# Altium PCB Buzzer_Led.PcbDoc
Units mm, origin at the board's own origin, x right, y up, seen from the top; angles counter-clockwise.
Board outline 71.37 x 15.37 mm, 2 copper layers (Top Layer, Bottom Layer); 5 components, 5 nets, 13 pads, 0 vias.
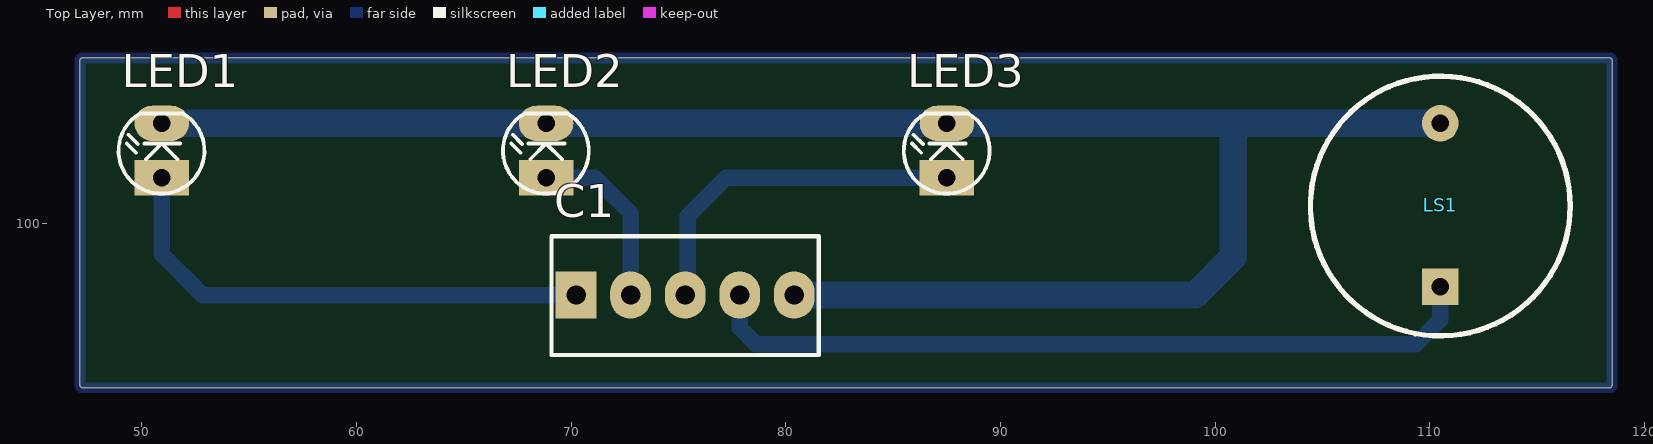
[diagram p0: Top Layer view]
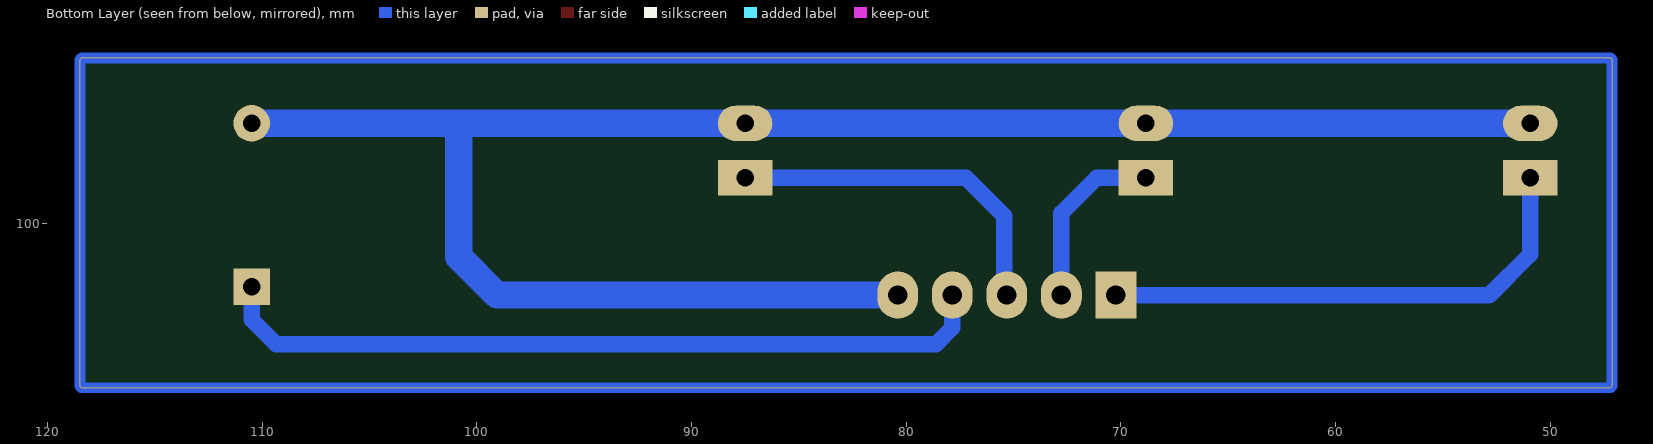
[diagram p1: Bottom Layer view, seen from below]
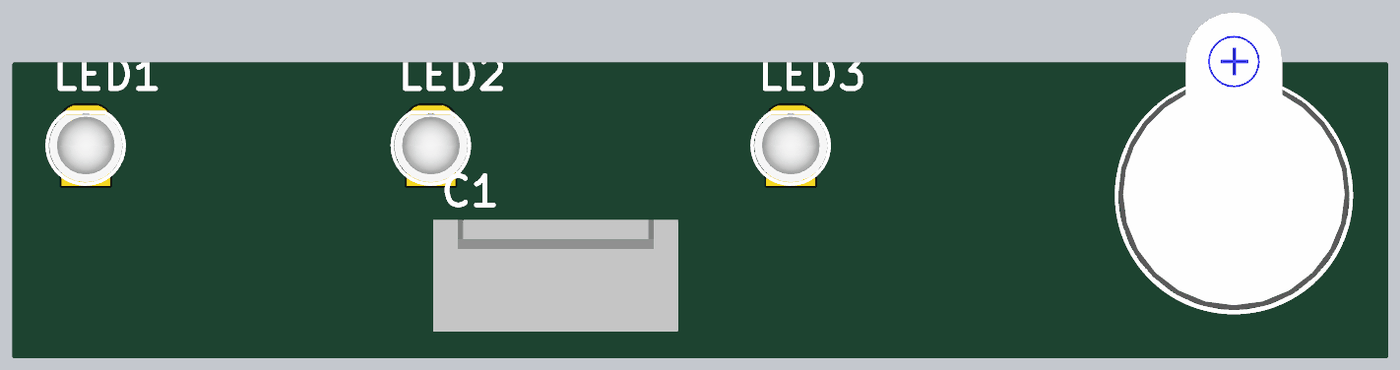
[diagram p2: 3D render of the assembled board from above, using the file's embedded part models]

## Layer stack, top to bottom
Top Solder: solder mask 0.0102, Solder Resist, Dk 3.5
Top Layer: signal copper 0.0356
Dielectric 1: dielectric 0.32, FR-4, Dk 4.8
Bottom Layer: signal copper 0.0356
Bottom Solder: solder mask 0.0102, Solder Resist, Dk 3.5

## Board outline
47.244,92.329 cw(c47.244,92.456) 47.117,92.456 47.117,107.569 cw(c47.244,107.569) 47.244,107.696 118.364,107.696 cw(c118.364,107.569) 118.491,107.569 118.491,92.456 cw(c118.364,92.456) 118.364,92.329

## Design rules (kind name [scope] priority, off if disabled: settings)
Clearance [All] p1: gap=0.3
PolygonConnect [All] p1: connectstyle=Relief reliefconductorwidth=0.254 reliefentries=4 polygonreliefangle="90 Angle" airgapwidth=0.254
RoutingVias [All] p1: holewidth=0.711 width=1.27 viastyle="Through Hole" minholewidth=0.711 minwidth=1.27 maxholewidth=0.711 maxwidth=1.27
SolderMaskExpansion [All] p1: expansion=0.102
Width [All] p1: maxlimit=1.27 minlimit=0.254 preferedwidth=0.762
30 further rules are at their usual default settings.

## Components (designator, comment, footprint, x,y, rotation, side; value= is the part's Value field where it differs from the comment)
C1 "canh bao" HDR5 70.231,96.647 r0 top
LED1 "LED" LED-3 50.927,102.108 r90 top
LED2 "LED" LED-3 68.834,102.108 r90 top
LED3 "LED" LED-3 87.503,102.108 r90 top
LS1 "Buzzer" Buzzer 110.49,97.028 r90 top

## Footprints (in the part's own frame and the unit in brackets; to place one, negate y for a bottom-side part, rotate by r counter-clockwise, add the part's x,y. Pads: shape width x height; smd on the part's side, far side on the other; paste and mask are expansions set on the pad)
Buzzer [mil] "Buzzer; Solder Pad 35mil"
  rect 67x67 hole 32: 1(0,0)
  round 67 hole 32: 2(300,0)
  silkscreen extent -90,-238 387,238, body extent -86,-236 522,236, height 177
HDR5 [mm] "Connector; Header; 5 Position"
  rect 1.9x2.2 hole 0.9: 1(0,0)
  oval 1.9x2.2 hole 0.9: 2(2.54,0) 3(5.08,0) 4(7.62,0) 5(10.16,0)
  silkscreen extent -1.14,-2.79 11.3,2.74, body extent -1.27,-2.92 11.43,2.88, height 11.72
LED-3 [mil] "LED 2 PIN, 3ly Only colour"
  rect 65x100 hole 32: 1(0,0)
  oval 65x100 hole 32: 2(100,0)
  silkscreen extent -29,-78 118,79, body extent -25,-75 113,75, height 217

## Part data
C1: library part Header5, "Header IDC, 5 x 1 Pin Vertical 2.54mm Pitch (Non-Boxed, Male)"
LED1 LED2 LED3: "LED Single colour Green and Red"
LS1: "Magnetic Transducer Buzzer"

## Nets (pads, with @x,y where several pads share a name; then routed paths per layer and width w, separated by ;. In a path a pad name is that pad's centre, name@x,y a point inside that pad or via, vN(x,y) a via of type N, cw(c..) or ccw(c..) an arc to the next point about the centre after c; other vN are vias at no path point)
BUZZER: C1.4 LS1.1 | length 36.5
  Bottom Layer w0.762: C1.4 77.851,95.123 78.613,94.361 109.347,94.361 110.49,95.504 LS1.1
GND: C1.5 LED1.2 LED2.2 LED3.2 LS1.2 | length 87
  Bottom Layer w1.27: LED1.2 LED3.2 100.838,104.648 ; C1.5 99.06,96.647 100.838,98.425 100.838,104.648 ; LS1.2 100.838,104.648
LED_DOOR: C1.1 LED1.1 | length 23.6
  Bottom Layer w0.762: LED1.1 50.927,98.552 52.832,96.647 C1.1
LED_LIQUID: C1.2 LED2.1 | length 8.7
  Bottom Layer w0.762: LED2.1@68.58,102.108 71.12,102.108 72.771,100.457 C1.2
LED_SET: C1.3 LED3.1 | length 15.8
  Bottom Layer w0.762: C1.3@75.438,97.282 75.438,100.33 77.216,102.108 LED3.1
copper on no net: | length 173.3
  Bottom Layer w0.5: 47.117,92.456 ccw(c47.244,92.456) 47.244,92.329 118.364,92.329 ccw(c118.364,92.456) 118.491,92.456 118.491,107.569 ccw(c118.364,107.569) 118.364,107.696 47.244,107.696 ccw(c47.244,107.569) 47.117,107.569 47.117,92.456